# Altium PCB ESE516_shipwars_PCB.PcbDoc (part 2 of 2)
Units mil, origin at the board's own origin, x right, y up, seen from the top; angles counter-clockwise.
Board outline 2999 x 2670.2 mil, 4 copper layers (Top Layer, GroundPlane, PowerPlane, Bottom Layer), stack 58.4 mil thick; 119 components, 72 nets, 383 pads, 75 vias.
Unrouted connection lines stored in the file: 92.
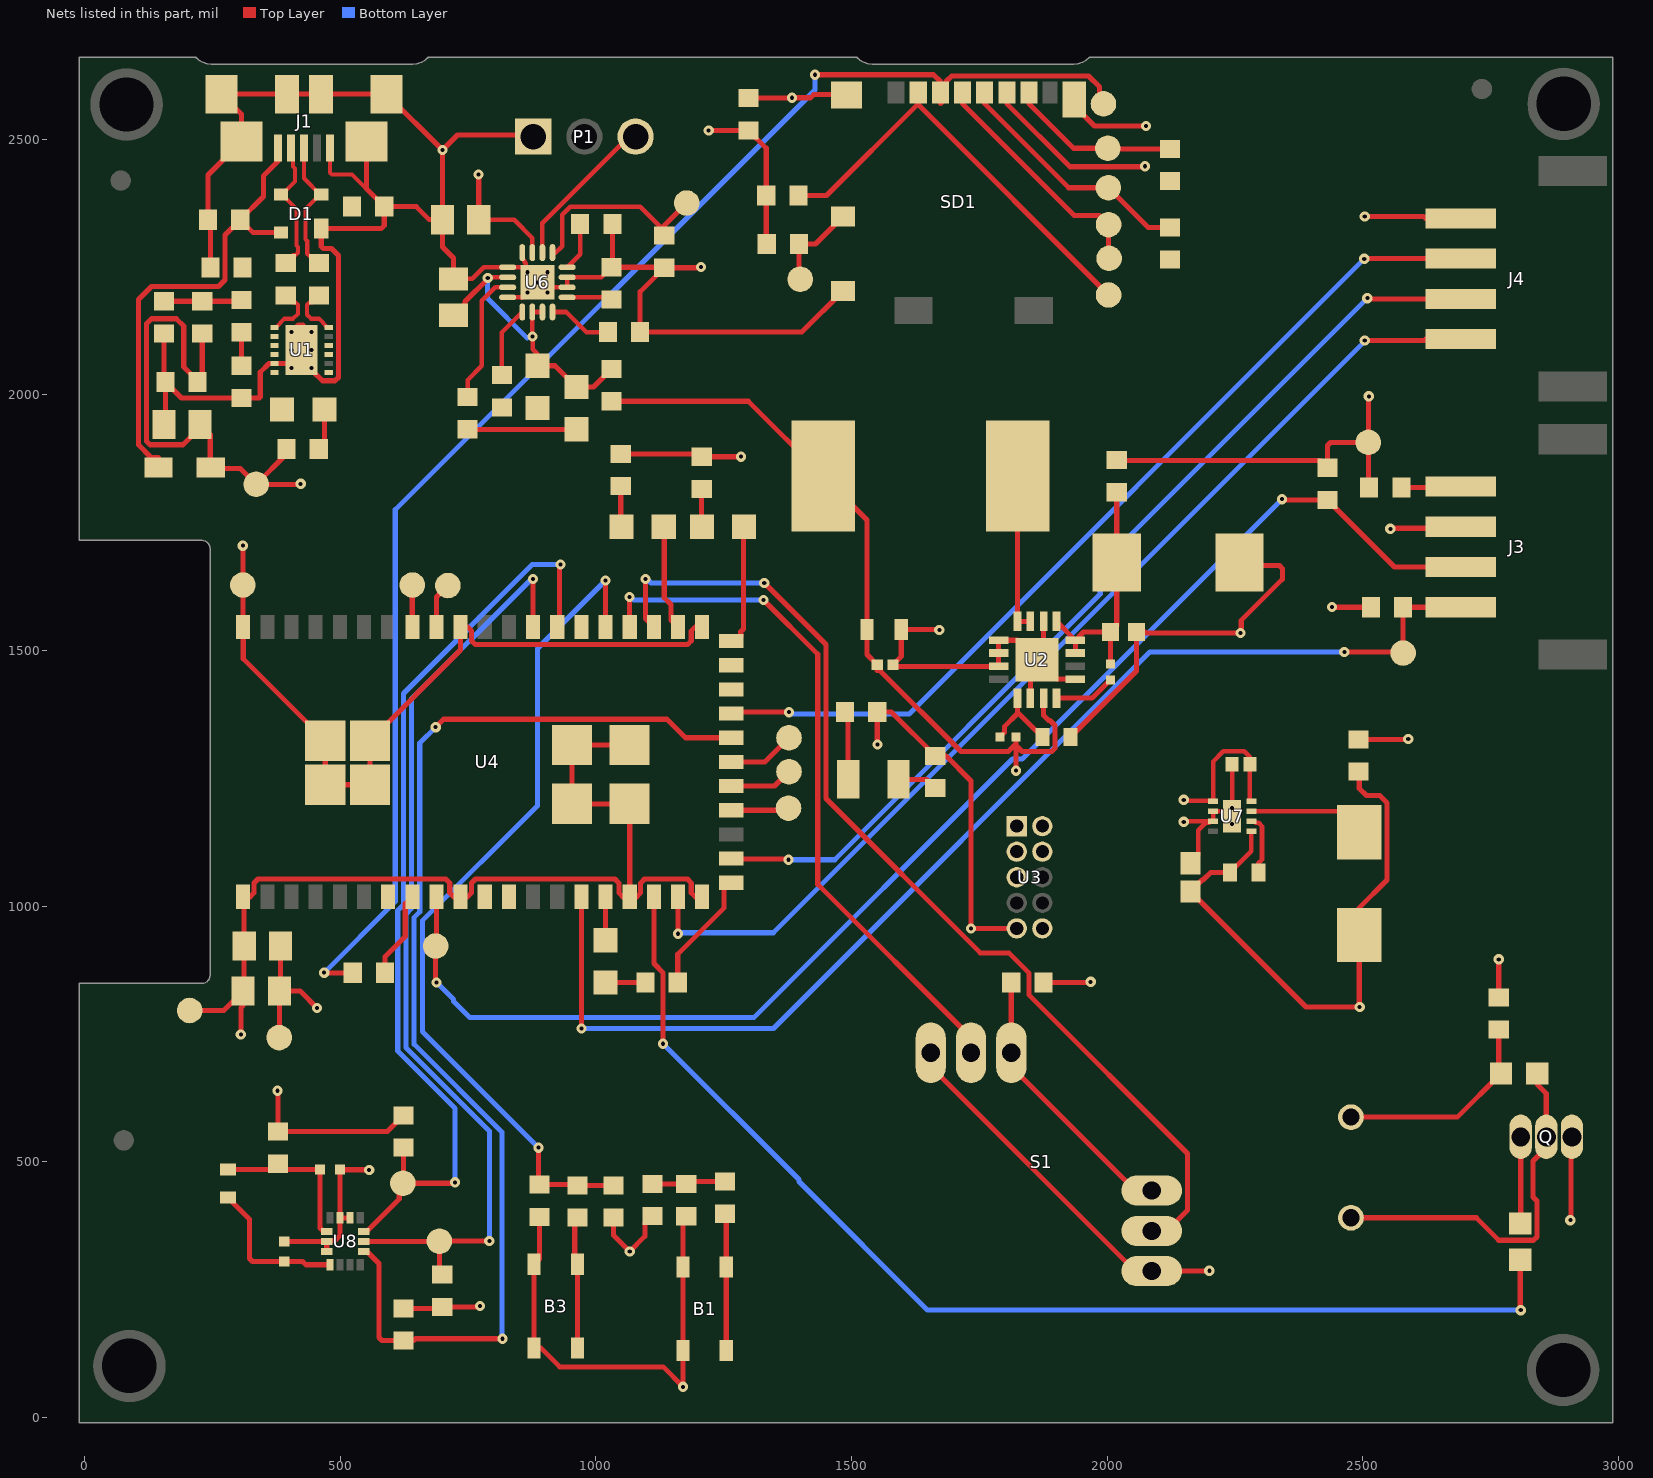
[diagram p2: the nets of this part, all layers, seen from the top]

## Part data (continued)
R1 R2 R8 R9 R10: library part CMP-1012-00331-1, "27R 0.1W 1% 0603 (1608 Metric)  SMD", Case-EIA=0603, Case-Metric=1608, Power="0.1 W", Tolerance="1 %", Technology=SMT
R1bck: library part CMP-1012-00762-2, "RC0603FR-07178KL", Manufacturer=Yageo, Part Number=RC0603FR-07178KL
R1bst: library part CMP-2002-00322-1, "1% 0402(1005)CRCW04022M15FKED", Manufacturer="Vishay Dale", Part Number=CRCW04022M15FKED
R2bst: library part CMP-1012-00802-1, "390K 0.1W 1% 0603 (1608 Metric)  SMD", Case-EIA=0603, Case-Metric=1608, Power="0.1 W", Tolerance="1 %", Technology=SMT
R3 R5 R6 R7 R15 R16 R18 R19 R24 R37: library part CMP-1012-00510-1, "1K 0.1W 1% 0603 (1608 Metric)  SMD", Case-EIA=0603, Case-Metric=1608, Power="0.1 W", Tolerance="1 %", Technology=SMT
R3bst: library part CMP-2002-00322-1, "1% 0402(1005) CRCW04022M15FKED", Manufacturer="Vishay Dale", Part Number=CRCW04022M15FKED
R4 R22 R23 R25 R27 R28 R31 R33: library part CMP-1012-00001-1, "Jumper 0603 (1608 Metric)", Case-EIA=0603, Case-Metric=1608, Power=None, Technology=SMT, Tolerance=None
R11 R13 R14 R17 R26 R29 R30 R32 R34: library part CMP-1012-00623-1, "10K 0.1W 1% 0603 (1608 Metric)  SMD", Case-EIA=0603, Case-Metric=1608, Power="0.1 W", Tolerance="1 %", Technology=SMT
R12 R35: library part CMP-1012-00397-1, "100R 0.1W 1% 0603 (1608 Metric)  SMD", Case-EIA=0603, Case-Metric=1608, Power="0.1 W", Tolerance="1 %", Technology=SMT
R20 R21: library part CMP-1012-00515-1, "1K13 0.1W 1% 0603 (1608 Metric)  SMD", Case-EIA=0603, Case-Metric=1608, Power="0.1 W", Tolerance="1 %", Technology=SMT
S1: "Mini 2-Axis Analog Thumbstick", Manufacturer="Adafruit Industries", Manufacturer Part Number=2765, Resistance=10kR, Supplier Part Number 1=1528-1730-ND, ComponentLink1Description=https://media.digikey.com/pdf/Data%20Sheets/Adafruit%20PDFs/2765_Web.pdf?src-supplier=Digi-Key, ComponentLink1URL=https://media.digikey.com/pdf/Data%20Sheets/Adafruit%20PDFs/2765_Web.pdf?src-supplier=Digi-Key, Height=0.472inch, Length=0.707inch, Mount="Through Hole", Packaging=Bulk, Pricing 1="1=2.50000 (USD)", RoHS=Yes, Stock 1=673, Supplier 1=Digi-Key, Width=0.697inch
SD1: library part CMP-2000-05825-1, "Micro SD Card, RA, -25 to 85 degC, 8-Pin SMD, RoHS, Tape and Reel", Current Rating=500mA, Manufacturer=Molex, Package Description="8-Pin Surface Mount Device, Body 11.95 x 11.4 mm, Pitch 1.1 mm", Voltage Rating=10VAC/DC, Brand=Molex, Card Type=microSD, Contact Material=PhosphorBronze, Contact Plating=Gold, Datasheet URL=http://www.molex.com/pdm_docs/sd/1040310811_sd.pdf, Datasheet Version="Rev. E, 04/2006", Height=1.42mm, Housing Material=LiquidCrystalPolymer(LCP), Insertion - Extraction Style=Push-Pull, Length=11.4mm, Manufacturer URL=http://www.molex.com/, Mating Cycles=10000, Mounting Technology=SurfaceMount, Mounting Type=Standard, Number of Contacts=8, Number of Rows=1Row, Orientation=RightAngle, Package Reference=104031-0811, Packaging=Reel, Pitch=1.1mm, Product=CardConnectors, Product Category=MemoryCardConnectors, RoHS=True, Series=104031, Termination Style=SMD
TP1 TP2 TP3 TP4 TP5 TP6 TP7 TP8 TP9 TP10 TP11 TP12 TP13 TP14 TP15 TP16 TP17 TP18 TP19 TP20 TP21 TP22: library part "0.1\" Pad-A.4"
U1: library part CMP-0248-00027-1, "FT234XD USB to BASIC UART IC, -40 to +85 degC, 12-Pin DFN, Pb-Free, Tape and Reel", Manufacturer=FTDI, ComponentLink1Description="Manufacturer URL", ComponentLink1URL=http://www.ftdichip.com/, ComponentLink2Description=Datasheet, ComponentLink2URL=http://www.ftdichip.com/Support/Documents/DataSheets/ICs/DS_FT234XD.pdf, DatasheetVersion="ver 1.1, Feb-2013", PackageDescription="12-Pin Dual Flat No-Lead, 3 x 3 mm Body, 0.45 mm Pitch, Exposed Pad", PackageReference=DFN-12, PackageVersion=Feb-13, PartNumber=FT234XD-R
U2: "5-V Output, 1-A, 96% Efficient Boost Converter w/20uA Iq in TSSOP-16 16-QFN -40 to 85", Case/Package=VQFN, Manufacturer="Texas Instruments", Max Input Voltage=5.5V, Max Operating Temperature=85°C, Max Output Current=1A, Min Input Voltage=1.8V, Min Operating Temperature=-40°C, Min Output Voltage=5V, Package Quantity=1, Quiescent Current=20uA, Switching Frequency=600kHz, Category="Voltage Regulators - Switching", ComponentLink1Description=https://datasheet.ciiva.com/15113/getdatasheetpartid-188315-15113727.pdf?src-supplier=Verical, ComponentLink1URL=https://datasheet.ciiva.com/15113/getdatasheetpartid-188315-15113727.pdf?src-supplier=Verical, ComponentLink2Description=https://datasheet.ciiva.com/26896/tps61032rsar-26896598.pdf?src-supplier=IIIC, ComponentLink2URL=https://datasheet.ciiva.com/26896/tps61032rsar-26896598.pdf?src-supplier=IIIC, ComponentLink3Description=https://datasheet.ciiva.com/2026/tps61030-2026189.pdf?src-supplier=Digi-Key, ComponentLink3URL=https://datasheet.ciiva.com/2026/tps61030-2026189.pdf?src-supplier=Digi-Key, ComponentLink4Description=https://datasheet.ciiva.com/2026/tps61030-2026190.pdf?src-supplier=Digi-Key, ComponentLink4URL=https://datasheet.ciiva.com/2026/tps61030-2026190.pdf?src-supplier=Digi-Key, ComponentLink5Description=https://datasheet.ciiva.com/2026/tps61030-2026191.pdf?src-supplier=Digi-Key, ComponentLink5URL=https://datasheet.ciiva.com/2026/tps61030-2026191.pdf?src-supplier=Digi-Key, ComponentLink6Description=https://datasheet.ciiva.com/22684/1902788-22684647.pdf?src-supplier=Element14, ComponentLink6URL=https://datasheet.ciiva.com/22684/1902788-22684647.pdf?src-supplier=Element14, Efficiency=96%, Lead Free="Lead Free", Manufacturer Part Number=TPS61032RSAR, Mount="Surface Mount", Nominal Output Voltage=5V, Number of Outputs=1, Number of Pins=16, Operating Supply Voltage=5.5V, Output Configuration=Positive, Output Current=1A, Output Type=Fixed, Output Voltage=5V, Packaging="Tape and Reel", Pricing 1="1=3.13000, 10=2.80800, 25=2.65440, 100=2.30060, 250=2.18260, 500=1.95844, 1000=1.94775 (USD)", Radiation Hardening=No, REACH SVHC="No SVHC", RoHS=Yes, RoHS Compliant=Yes, Series=-, Stock 1=952, Supplier 1=Digi-Key, Synchronous Rectifier=Yes, Topology=Boost, Weight=0.001464oz, Width=4mm
U3: "CONN HEADER 10POS UNSHD VERT T/H", Current Rating="10 A", Manufacturer="Amphenol / FCI", Supplier Part Number 1=609-3712-ND, Voltage Rating="125 V", Brand=FCI, ComponentLink1Description=https://datasheet.ciiva.com/1433/1079612-1433267.pdf, ComponentLink1URL=https://datasheet.ciiva.com/1433/1079612-1433267.pdf, ComponentLink2Description=https://datasheet.ciiva.com/409/20021111-409158.pdf, ComponentLink2URL=https://datasheet.ciiva.com/409/20021111-409158.pdf, ComponentLink3Description=https://datasheet.ciiva.com/5131/20021111-5131386.pdf, ComponentLink3URL=https://datasheet.ciiva.com/5131/20021111-5131386.pdf, ComponentLink4Description=https://datasheet.ciiva.com/9465/20021111-9465402.pdf, ComponentLink4URL=https://datasheet.ciiva.com/9465/20021111-9465402.pdf, Contact Material=Nickel, Contact Plating=Gold, Factory Pack Quantity=93, Housing Material=Plastic, Manufacturer Part Number=20021111-00010T4LF, Mating Post Length="3.05 mm", Mounting Angle=Vertical, Mounting Style="Through Hole", Number of Positions=10, Number of Positions / Contacts=10, Number of Rows=2, Packaging=Tube, Pitch="1.27 mm", Product Category="Headers & Wire Housings", Product Type=Headers, RoHS=Details, Series=Minitek, Stack Height="2.5 mm", Supplier 1=Digi-Key, Termination Post Length="2.3 mm", Termination Style="Through Hole", Type=Unshrouded
U4: "RF TXRX MODULE WIFI TRACE ANT", Current - Receiving=-, Frequency=2.4GHz, Manufacturer=Atmel, Manufacturer Part Number=ATSAMW25H18-MR510PB, Operating Temperature="-40°C ~ 85°C", Package / Case=Module, Power - Output=17dBm, Supplier Part Number 1=ATSAMW25H18-MR510PB-ND, Voltage - Supply="2.7 V ~ 4.2 V", Antenna Type="Integrated, Trace", Category="RF/IF and RFID", ComponentLink1Description=http://www.atmel.com/devices/ATSAMW25.aspx, ComponentLink1URL=http://www.atmel.com/devices/ATSAMW25.aspx, ComponentLink2Description=http://www.farnell.com/datasheets/1965115.pdf, ComponentLink2URL=http://www.farnell.com/datasheets/1965115.pdf, Current - Transmitting=-, Data Rate=65Mbps, Family="RF Transceiver Modules", Memory Size="256kB Flash, 32kB SRAM", Modulation=-, Mounting Type="Surface Mount", Packaging=Tray, Pricing 1="1=19.14 (USD)", Protocol=802.11b/g/n, RF Family/Standard=WiFi, Sensitivity=-95.5dBm, Serial Interfaces="SPI, UART", Series="Xplained Pro", Stock 1=120, Supplier 1=Digikey
U6: library part CMP-0321-00237-1, "USB-Friendly Li-Ion Battery Charger and Power-Path Management IC, Vout 5.5 V, 4.3 V, -40 to 85 degC, 16-pin QFN (RGT), Green (RoHS & no Sb/Br)", Manufacturer="Texas Instruments", Over Voltage Protection=N, Code_JEDEC=MO-220, ComponentLink1Description=Datasheet, ComponentLink1URL=http://www.ti.com/general/docs/lit/getliterature.tsp?genericPartNumber=BQ24075&fileType=pdf, DatasheetVersion=SLUS810G, Eco-Plan="Green (RoHS & no Sb/Br)", Lead Acid=N, Li-Ion=N, Li-Polymer=N, Mounting Technology="Surface Mount", NiCd=N, NiMH=N, PackageDescription="16-Pin Plastic Quad Flat No-Lead, 3 x 3 mm Body, 0.5 mm Pitch, 1.7 x 1.7 mm Exposed Pad", PackageReference=RGT16-1700X1700TP, PackageVersion="revH, Oct-2011", PartNumber=BQ24075RGTRG4, SubFamily="Battery Charge Management", Vin(Min)(V)=4.3
U7: library part CMP-0323-00344-1, "Buck Step Down Regulator with 2.3 to 6 V Input and 3.3 V Output, -40 to 85 degC, 8-Pin WSON (DSG), Green (RoHS & no Sb/Br)", Manufacturer="Texas Instruments", Rating=Catalog, Switch Current Limit(Typ)(A)=2.4, Code_JEDEC=MO-229, ComponentLink1Description=Datasheet, ComponentLink1URL=http://www.ti.com/general/docs/lit/getliterature.tsp?genericPartNumber=TPS62082&fileType=pdf, ComponentLink2Description="URL Link1", ComponentLink2URL="Samples URL:http://www.ti.com/product/tps62082#samples", DatasheetVersion=SLVSAE8B, Duty Cycle(Max)(%)=100, Eco-Plan="Green (RoHS & no Sb/Br)", Iout(Max)(A)=1.2, Iq(Typ)(mA)=0.006, Mounting Technology="Surface Mount", PackageDescription="8-Pin Plastic Small Outline No-Lead, 2 x 2 x 0.8 mm Body, 0.5 mm Pitch, Exposed Pad", PackageReference=DSG8-1600X900TP, PackageVersion="revB, Oct-2010", PartNumber=TPS62082DSGR, Regulated Outputs(#)=1, SubFamily="Step-Down Regulator", Topology=Buck, Vin(Max)(V)=6, Vin(Min)(V)=2.3, Vout(Max)(V)=3.3, Vout(Min)(V)=3.3
U8: library part CMP-12177-000012-1, "INEMO INERTIAL MODULE: 3D ACCELE", Manufacturer=STMicroelectronics, Max Supply Voltage=3.6V, Min Supply Voltage=1.62V, Operating Supply Current=0.55mA, Package=LGA-14L-DM00249496, Temperature="-40°C to +85°C", Temperature Range High=+85°C, Temperature Range Low=-40°C, Accel Range=2/4/8/16g, Automotive=No, Category=IC, ComponentLink2Description=Datasheet, ComponentLink2URL=https://www.st.com/resource/en/datasheet/lsm6dso.pdf, Device Class L1=Sensors, Device Class L2="Motion Sensors", Device Class L3="Inertial Measurement Units (IMUs)", Digikey Description="CONSUMER MEMS", Footprint Url=https://www.st.com/content/ccc/resource/technical/document/technical_note/73/17/9c/16/dd/96/4a/01/CD00134799.pdf/files/CD00134799.pdf/jcr:content/translations/en.CD00134799.pdf, Gyro Range=125/250/500/1000/2000°/s, Height=0.86mm, Lead Free=Yes, Manufacturer Part Number=LSM6DSOTR, Octopart=https://octopart.com/lsm6dsotr-stmicroelectronics-81706672, RoHS=TRUE, Sensor Output=I2C,SPI, Sensor Type=Temperature,Accelerometer,Gyroscope
X1: library part CMP-0447-00001-2, "Crystal, 32.768 kHz, 12.5 pF, -40 to 85 degC, SMD Low Profile 3.2 x 1.5 x 0.9 mm, Tape and Reel", Equivalent Series Resistance (R1)="70 Kohm", Frequency="32.768 kHz", Frequency Tolerance @+25degC="+/- 20 ppm", Insulation Resistance (Min)="500 Mohm", Load Capacitance (CL)="12.5 pF", Manufacturer=Abracon, Operating Temperature="-40 to 85 degC", Q Value (Type)=30000, Shunt Capacitance (C0)="0.9 to 1.2 pF", ComponentLink1Description="Manufacturer URL", ComponentLink1URL=http://www.abracon.com/, ComponentLink2Description=Datasheet, ComponentLink2URL=http://www.abracon.com/Resonators/ABS07.pdf, ComponentLink3Description="Package Specification", ComponentLink3URL=http://www.abracon.com/Resonators/ABS07.pdf, DatasheetVersion=04.03.13, Drive Level (Type)="0.1 uW", Mounting Technology="Surface Mount", Operation Mode="Flexural Mode (Tuning Fork)", PackageDescription="2-Pin Hand Drawn, Body 3.2x1.5mm, Pitch 2.5mm", PackageReference=ABS07-2, Packing="Tape and Reel", PartNumber=ABS07-32.768KHz-T

## Free pads (board coordinates)
  round 141.73 hole 106.3 paste-102.36: HH1(82.52,2567.69) HH2(2893,2569) HH3(88,101) HH4(2892,93)

## Via types
v1: diameter 20, hole 8, Top Layer to Bottom Layer, 62 vias
v2: diameter 19.68, hole 7.87, Top Layer to Bottom Layer, 8 vias
v3: diameter 19.68, hole 7.87, Top Layer to Bottom Layer, tented top, 5 vias

## Nets (pads, with @x,y where several pads share a name; then routed paths per layer and width w, separated by ;. In a path a pad name is that pad's centre, name@x,y a point inside that pad or via, vN(x,y) a via of type N, cw(c..) or ccw(c..) an arc to the next point about the centre after c; other vN are vias at no path point)
3V3: C10.2 C11.2 C15.2 R7.1 R11.2 R13.2 R14.2 R24.1 R25.2 R28.2 R29.2 R30.2 R31.2 R32.2 R33.2 R34.1 R37.1 SD1.4 TP6.1 TP12.1 TP22.1 U3.1 U4.7 U4.21 | length 2451.2
  Top Layer w10: v1(378,639) 379,638 R28.2@379,559.22 592.5,559.22 R30.2@624,590.72 ; TP12.1@381,743 381.43,743.43 C11.2@381.43,834 ; C10.2@383.43,922 383.43,836 C11.2@381.43,834 ; v1(455,801) 422,834 C11.2@381.43,834 ; R34.1@624,213.44 696.93,213.44 R29.2@700,216.5 772.5,216.5 v1(774,218) ; R32.2@1035,390.88 1035,356.41 v1(1066.56,324.85) 1096.11,354.41 1096.11,381.04 1108.83,393.76 R11.2@1110.8,393.76 ; R37.1@1049,1884.5 1201.79,1884.5 R24.1@1207.29,1879 v1(1284,1879) ; R7.1@1160.5,851 1160.5,906.02 1251.24,996.76 1251.24,1032.09 U4.21@1265.02,1045.87 ; v1(1221,2517) 1221.13,2517.13 C15.2@1298.5,2517.13 1333.5,2482.13 R13.2@1333.5,2390 1333.5,2296 R14.2@1334.5,2295 ; SD1.4@1717.38,2591.09 1717.38,2569.44 1935.93,2350.89 1984.98,2350.89 TP6.1@2003,2332.87 2003,2267.87 TP22.1@2004,2266.87 ; R33.2@1875.73,851 1967,851 v1(1968,852) ; R25.2@2492,1326 2588,1326 v1(2589,1327) ; R31.2@2766,821.5 v1(2766,896)
5V: C8.2 R17.2 R22.2 R26.2 R27.2 TP20.1 U7.1 U7.8 | length 1103.8
  Top Layer w9: v1(2150,1208) 2151.46,1206.54 2206.81,1206.54 2207.31,1206.03 2207.31,1282.93 2227.56,1303.17 2268.28,1303.17 2279.28,1292.17 C8.2@2279.28,1278 2279.28,1208.36 U7.8@2282.12,1205.53
  Top Layer w10: R22.2@2022,1871.5 2417,1871.5 R17.2@2431,1857.5 2431,1901.14 2436.86,1907 TP20.1@2511,1907 ; v1(2440,1585) 2440.48,1584.52 R26.2@2515.95,1584.52 ; v1(2512,1997) 2511,1996 TP20.1@2511,1907 ; R27.2@2512.5,1819 2511,1820.5 TP20.1@2511,1907
ACC_I2C_SCL: R29.1 TP19.1 U4.39 U8.13 | length 1872.9
  Top Layer w10: U8.13@546,344.54 694.34,344.54 TP19.1@694.34,344.88 791.88,344.88 v1(792,345) ; R29.1@694.34,276.43 TP19.1@694.34,341.54 ; U4.39@877.58,1546.03 v1(877.58,1640)
  Bottom Layer w10: v1(792,345) 792,560.33 629,723.33 629,984.75 640,995.75 640,1405.76 874.24,1640 v1(877.58,1640)
ACC_I2C_SDA: R30.1 TP21.1 U4.38 U8.14 | length 1845.5
  Top Layer w10: U8.14@546,364.22 552.89,364.22 615.92,427.25 615.92,434.14 623,441.22 TP21.1@623,458.22 ; R30.1@624,527.73 624,459.22 TP21.1@623,458.22 ; v1(725,460) 723.22,458.22 TP21.1@623,458.22 ; U4.38@924.82,1546.03 929.09,1550.3 929.09,1666.09 v1(931,1668)
  Bottom Layer w10: v1(725,460) 725,604.7 613,716.7 613,991.37 624,1002.37 624,1416.12 875.88,1668 v1(931,1668)
ACC_MODE_SEL: R34.2 U4.27 U8.12 | length 2315.5
  Top Layer w10: U8.12@546,324.85 552.89,324.85 576.32,301.42 576.32,156.3 582.18,150.44 643.68,150.44 647.24,154 v1(818,154) ; v1(687,1350) 687,1350.4 702.24,1365.64 1139.36,1365.64 1175.66,1329.34 U4.27@1265.02,1329.34
  Bottom Layer w10: v1(687,1350) 656,1319 656,989.12 645,978.12 645,729.96 817,557.96 817,155 v1(818,154)
ADC_1_THUMBSTICK: S1.X1 U4.35 | length 1376.9
  Top Layer w10: v1(1066,1604.6) 1066,1546.58 U4.35@1066.56,1546.03 ; v1(1328,1599) 1434.28,1492.72 1434.28,1042.7 1734.02,742.96 S1.X1@1734.02,713.43
  Bottom Layer w10: v1(1066,1604.6) 1068.71,1604.6 1074.31,1599 v1(1328,1599)
ADC_2_THUMBSTICK: S1.Y1 U4.34 | length 2025.3
  Top Layer w10: v1(1097.5,1640) 1097.5,1562.33 U4.34@1113.8,1546.03 ; v1(1329.63,1632) 1330,1632 1450.28,1511.72 1450.28,1210.58 1752.1,908.76 1807.94,908.76 1847.02,869.68 1847.02,826.76 2157.41,516.37 2157.41,405.53 2116.88,365 S1.Y1@2087.35,365
  Bottom Layer w10: v1(1097.5,1640) 1100.21,1640 1108.21,1632 v1(1329.63,1632)
BCK_SW: L1bck.1 U7.7 | length 228.2
  Top Layer w9: U7.7@2282.12,1185.84 L1bck.1@2451.69,1185.84
  Top Layer w10: L1bck.1@2451.69,1185.84 L1bck.1@2493.14,1144.39
BQ_BAT_TS: R6.1 TP5.1 U6.1 | length 392.6
  Top Layer w9: U6.1@915.53,2278.07 921.49,2278.07 934.36,2290.94 934.36,2351.82 950.55,2368 1086.99,2368 1134,2320.99 R6.1@1134,2311.5
  Top Layer w10: R6.1@1134,2320.99 1134,2331 TP5.1@1178,2375
BQ_ILIM: R20.2 U6.12 | length 125.2
  Top Layer w9: U6.12@915.53,2161.93 942.36,2161.93 982,2122.29 1023.15,2122.29 R20.2@1024,2123.14
BQ_ISET: R21.2 U6.16 | length 95
  Top Layer w9: U6.16@944.07,2249.53 969.5,2274.96 R21.2@969.5,2334
BST_SWTC_IN: L1bst.1 U2.3 U2.4 | length 309
  Top Layer w10: L1bst.1@1825,1841 U2.4@1825,1557 U2.3@1850,1557
CBUS0: D5.2 U1.6
FLASH_MEM_SPI_SS: R13.1 SD1.2 TP11.1 U4.37 | length 858.6
  Top Layer w10: R13.1@1396.5,2390 1451.33,2390 SD1.2@1630.77,2569.44 ; SD1.2@1630.77,2591.09 SD1.2@1630.77,2569.44 ; TP11.1@2003,2195.3 1630.77,2567.53 SD1.2@1630.77,2569.44
GND: B1.3 B1.4 B3.3 B3.4 C1.1 C1bst.1 C2.1 C2bst.1 C3.1 C3bst.1 C4.1 C4bst.2 C5.1 C6.1 C7.1 C8.1 C10.1 C11.1 C12.1 C13.1 C14.1 C15.1 C16.2 C17.2 C18.1 C24.1 C25.1 C26.2 Coutbck.1 D1.1 J1.5 J1.6 J1.7 J1.8 J1.9 J1.10 J1.11 J3.3 J4.4 P1.1 Q.1 R2bst.1 R6.2 R20.1 R21.1 S1.X3 S1.Y3 SD1.6 SD1.10 SD1.11 SD1.12 TP3.1 TP13.1 U1.5 U1.13 U2.2 U2.5 U2.6 U2.7 U2.10 U2.13 U2.17 U3.3 U3.5 U3.9 U4.0 U4.1 U4.10 U4.17 U4.20 U4.32 U4.42 U4.51 U6.4 U6.5 U6.8 U6.14 U6.15 U6.17 U7.2 U7.3 U7.9 U8.2 U8.3 U8.6 U8.7 | length 13283.5
  Top Layer w8: J1.5@480.76,2482.69 480.76,2434.24 484,2431 523.5,2431 551.63,2402.87
  Top Layer w9: C25.1@722,2226.43 722.74,2227.18 758.77,2227.18 780.73,2249.14 827.38,2249.14 U6.5@827.93,2248.59 ; U6.8@827.93,2190.47 U6.17@856.47,2190.47 ; U6.5@827.93,2249.53 856.47,2249.53 859.66,2246.34 U6.17@859.66,2249.53 ; U6.4@856.47,2278.07 856.47,2266.3 860.15,2262.63 860.15,2261.75 860.15,2260.22 863.38,2256.98 863.38,2242.62 v3(886,2220) ; U6.17@914.46,2210.16 U6.14@944.07,2210.16 U6.15@944.07,2229.84 1011.32,2229.84 C24.1@1031,2249.53 ; v1(2150,1165) 2151.16,1166.16 U7.3@2207.31,1166.16 ; Coutbck.1@2163.34,1083.72 2178.15,1098.52 2178.15,1148.21 2192.92,1162.98 2199.81,1162.98 2202.47,1165.65 2206.8,1165.65 U7.3@2207.31,1166.16 ; C8.1@2244.72,1278 v2(2244.72,1191.75) 2238.81,1185.84 U7.2@2207.31,1185.84 U7.3@2207.31,1166.16
  Top Layer w10: C4.1@155.57,1942 158.5,1944.94 C3.1@158.5,2025.28 ; C7.1@155.57,2120.11 155.57,2028.21 C3.1@158.5,2025.28 ; TP13.1@206,796 272.57,796 C11.1@310.57,834 ; C5.1@246.5,2249 246.5,2338 C2.1@242.01,2342.5 242.01,2429.95 J1.11@307.54,2495.48 307.54,2548.63 J1.10@268.17,2588 J1.9@396.12,2588 J1.8@463.05,2588 J1.7@591,2588 v1(700.41,2478.59) ; v1(306,749) 306,800.89 310.57,805.46 C11.1@310.57,834 ; v1(310,1705) TP3.1@310,1628 310,1546.68 U4.51@310.65,1546.03 310.65,1483.81 U4.0@471.08,1323.38 U4.0@471.08,1237.47 U4.0@558.41,1237.47 U4.0@558.41,1323.38 735.85,1500.82 U4.42@735.85,1546.03 749.63,1546.03 757.19,1538.47 757.19,1518.97 764.75,1511.41 1179.38,1511.41 1186.94,1518.97 1186.94,1538.47 1194.51,1546.03 U4.32@1208.29,1546.03 ; C16.2@391,344.54 U8.6@474.15,344.54 ; v2(405.17,2052.28) 396.31,2061.13 U1.5@371.7,2061.13 361.07,2061.13 344,2044.07 344,1995.56 342.22,1993.78 C1.1@307.54,1993.78 190,1993.78 C3.1@158.5,2025.28 ; v2(405.17,2123.14) 418.94,2136.92 427.23,2136.92 446.4,2117.75 446.4,2046.67 465.57,2027.5 490.43,2027.5 496.87,2033.94 496.87,2272.58 483.24,2286.21 467.35,2286.21 463.25,2290.31 D1.1@463.25,2325 580.5,2325 586.5,2331 C6.1@586.5,2368 ; U8.7@474.15,324.85 U8.6@474.15,344.54 ; U8.2@519.92,390.31 U8.3@500.23,390.31 ; J1.6@551.63,2495.48 551.63,2402.87 C6.1@586.5,2368 ; v1(557,484) 556.5,484.5 500.73,484.5 C17.2@500.23,485 U8.3@500.23,390.31 ; C25.1@722,2226.43 722,2267.63 700.41,2289.21 C26.2@700.41,2342.5 ; U6.17@856.47,2190.47 v3(866.32,2200.31) ; U6.17@859.66,2246.34 v3(866.31,2239.68) ; P1.1@870,2508 729.83,2508 v1(700.41,2478.59) ; C18.1@890,392.5 890,310.02 B3.3@879.68,299.69 B3.4@879.68,136.31 892.47,136.31 929.67,99.11 1131.89,99.11 v1@1170.68,60.32 ; v3(905.69,2200.31) 905.69,2201.38 U6.17@914.46,2210.16 ; R21.1@1032.5,2334 1032.5,2251.02 C24.1@1031,2249.53 1132.98,2249.53 R6.2@1134,2248.5 ; U4.0@1066,1315.27 U4.0@953.6,1315.27 U4.0@953.6,1200.15 U4.0@1066,1200.15 1066.56,1199.6 U4.17@1066.56,1018.47 ; v1(1171,60) v1@1170.68,60.32 ; C12.1@1177,393.5 1170.68,387.18 B1.3@1170.68,294.69 B1.4@1170.68,131.31 v1@1170.68,60.32 ; v1(1206,2250) 1204.5,2248.5 R6.2@1134,2248.5 ; U4.20@1208.29,1018.47 1194.51,1018.47 1186.94,1026.04 1186.94,1045.53 1179.38,1053.09 1095.46,1053.09 1087.9,1045.53 1087.9,1026.04 1080.33,1018.47 U4.17@1066.56,1018.47 ; C15.1@1298.5,2580.13 1383.13,2580.13 v1(1384,2581) 1420.4,2581 1426.4,2587 1491,2587 1490.17,2586.17 SD1.11@1490.61,2586.17 ; SD1.10@1483.72,2203.3 1403.57,2123.14 R20.1@1086.99,2123.14 1086.99,2201.5 R6.2@1134,2248.5 ; v1(1551,1316) 1550.65,1316.35 C13.1@1550.65,1379.44 1578.55,1379.44 C14.1@1664,1293.99 1684.96,1293.99 1734.02,1244.94 v1(1734.02,956.54) U3.9@1823.44,956.54 ; S1.X3@1655.26,713.43 1655.26,686.36 2055.36,286.26 S1.Y3@2087.35,286.26 2087.72,286.63 2199.63,286.63 v1(2200,287) ; v1(1672,1540) 1671,1541 C1bst.1@1597.46,1541 1597.46,1488.11 C2bst.1@1581.35,1472 1584.35,1469 U2.7@1788,1469 U2.6@1788,1495 U2.5@1788,1520 1825,1520 U2.17@1863,1482 ; SD1.6@1804,2591.09 1804,2569.44 1927.31,2446.13 2073.13,2446.13 v1(2074,2447) ; U2.10@1850,1407 1850,1469 U2.17@1863,1482 ; U2.2@1876,1557 1876,1495 U2.17@1863,1482 ; R2bst.1@1928.56,1331 2057.59,1460.03 C3bst.1@2057.59,1536 2074.32,1536 2076.32,1534 v1(2261,1534) 2262.5,1535.5 2262.5,1559 2342.86,1639.35 2342.86,1660.14 2337,1666 2265.08,1666 C4bst.2@2259.08,1672 ; SD1.12@1936.28,2577.31 1936.28,2564.91 1975.69,2525.5 v1(2076.32,2525.5) ; U2.13@1938,1444 1901,1444 U2.17@1863,1482 ; v1(2504,2349) 2619.15,2349 2623.1,2345.05 J4.4@2692,2345.05 ; v1(2554,1738) 2555,1739 2688,1739 2691,1742 J3.3@2692,1742 ; v1(2906,386) 2907.5,387.5 2907.5,547.5 Q.1@2909,549 ; C11.1@310.57,834 312.57,836 C10.1@312.57,922 312.57,1016.56 U4.1@310.65,1018.47 324.43,1018.47 331.99,1026.04 331.99,1045.53 339.56,1053.09 706.94,1053.09 714.5,1045.53 714.5,1026.04 722.07,1018.47 U4.10@735.85,1018.47 749.63,1018.47 757.19,1026.04 757.19,1045.53 764.75,1053.09 1037.65,1053.09 1045.21,1045.53 1045.21,1026.04 1052.78,1018.47 U4.17@1066.56,1018.47 ; U8.6@474.15,344.54 481.04,344.54 482.83,346.33 490.02,346.33 500.23,356.54 U8.3@500.23,390.31 ; C6.1@586.5,2368 649,2368 674.5,2342.5 C26.2@700.41,2342.5 ; C26.2@700.41,2342.5 v1(700.41,2478.59)
  other v2: 2244.72,1160.25 444.54,2052.28 405.17,2087.71 444.54,2087.71 444.54,2123.14
  other v3: 905.68,2239.69
KEYPAD_I2C_SCL: J3.2 R17.1 TP17.1 U4.9 | length 2678.9
  Top Layer w10: TP17.1@684.5,922 688.6,926.11 U4.9@688.6,1018.47 ; TP17.1@687,922 687,852.6 v1(688.6,851) ; v1(2342,1796) 2343.5,1794.5 R17.1@2431,1794.5 2562.24,1663.26 J3.2@2692,1663.26
  Bottom Layer w10: v1(688.6,851) 722.26,817.34 722.26,813.74 754,782 1309.3,782 1815.34,1288.04 1834.04,1288.04 v1(2342,1796)
KEYPAD_I2C_SDA: J3.1 R26.1 TP18.1 U4.15 | length 2372.6
  Top Layer w10: v1(972.07,761) U4.15@972.07,1018.47 ; v1(2464,1497) 2576.94,1497 TP18.1@2578.94,1495 R26.1@2578.94,1584.52 J3.1@2692,1584.52
  Bottom Layer w10: v1(972.07,761) 1347.7,761 2083.7,1497 v1(2464,1497)
MCU_LED: DS1.2 U4.16 | length 85
  Top Layer w10: DS1.2@1019.31,933.5 U4.16@1019.31,1018.47
MCU_RESET: C12.2 R11.1 R12.2 TP16.1 U3.10 U4.24 | length 262.3
  Top Layer w10: R11.1@1107.8,459.75 R11.1@1110.8,456.75 1111.05,456.5 C12.2@1177,456.5 1182,461.5 R12.2@1253,461.5 ; U4.24@1265.02,1187.61 1372.86,1187.61 TP16.1@1377,1191.75
MCU_RX_UART_CLI: TP4.1 U1.10 U4.44 | length 82
  Top Layer w10: U4.44@641.36,1546.03 TP4.1@641.36,1628
MCU_TX_UART_CLI: TP2.1 U1.7 U4.43 | length 90.2
  Top Layer w10: U4.43@688.6,1546.03 688.6,1604.6 TP2.1@711,1627
MEM_SPI_CLK: R10.2 SD1.5 TP10.1 | length 484.2
  Top Layer w10: SD1.5@1760.69,2591.09 1760.69,2569.44 1925.13,2405 TP10.1@2002.59,2405 2080.09,2327.5 R10.2@2123,2327.5
MEM_SPI_MISO: R8.2 SD1.7 TP9.1 | length 334
  Top Layer w10: SD1.7@1847.3,2591.09 1847.3,2569.44 1934.61,2482.13 TP9.1@2001.59,2482.13 2002.72,2480.99 R8.2@2123,2480.99
MEM_SPI_MOSI: R9.2 SD1.3 TP8.1 | length 2901.7
  Top Layer w10: v1(469,870) 469.32,869.68 R9.2@525,869.68 ; v1(1429,2626) 1660.82,2626 1674.07,2612.74 SD1.3@1674.07,2591.09 1674.07,2569.44 1685.08,2580.45 1685.08,2612.73 1696.09,2623.74 1963.87,2623.74 1985.35,2602.27 1985.35,2576.65 TP8.1@1993,2569
  Bottom Layer w10: v1(469,870) 608,1009 608,1775.3 1429,2596.3 v1(1429,2626)
NetB1_1: B1.1 B1.2 R12.1 | length 268.2
  Top Layer w10: R12.1@1253,398.5 1255.32,396.18 B1.1@1255.32,294.69 B1.2@1255.32,131.31
NetB3_1: B3.1 B3.2 R35.1 | length 260.4
  Top Layer w10: R35.1@959,394.5 959,305.02 B3.1@964.32,299.69 B3.2@964.32,136.31
NetC16_1: C16.1 FB2.1 U8.8 | length 309.8
  Top Layer w10: FB2.1@291.89,429.88 FB2.1@281,429.88 323,387.88 323,311.03 328.86,305.17 C16.1@391,305.17 426.74,305.17 433.14,298.77 U8.8@480.55,298.77
NetD3_2: D3.2 R18.2 | length 13
  Top Layer w10: D3.2@876.84,1964.94 D3.2@886,1974.09
NetD4_2: D4.2 R19.2 | length 212.5
  Top Layer w10: R19.2@749.63,1932.57 D4.2@962.13,1932.57
NetD5_1: D5.1 R3.1 | length 81.5
  Top Layer w10: R3.1@458.5,1894 469.34,1904.84 D5.1@469.34,1971
NetDS1_1: DS1.1 R7.2 | length 78.3
  Top Layer w10: DS1.1@1019.31,850.82 1097.32,850.82 R7.2@1097.5,851
NetDS2_1: DS2.1 R24.2 | length 74.2
  Top Layer w10: R24.2@1207.29,1816.01 1207.29,1742.37 DS2.1@1207.66,1742
NetDS3_1: DS3.1 R37.2 | length 80.1
  Top Layer w10: R37.2@1049,1821.5 1049,1743.32 DS3.1@1050.32,1742
NetJ3_4: J3.4 R27.1 | length 117.2
  Top Layer w10: R27.1@2575.5,1819 2690.26,1819 J3.4@2692,1820.74
NetLS_1: LS.1 Q.2 R15.1 | length 725.4
  Top Layer w10: LS.1@2477,390.57 2722.23,390.57 2766.02,346.78 2834.21,346.78 2840.65,353.22 2840.65,423.54 2833.08,431.11 2833.08,501.43 2859,527.35 2859,633.78 2841.43,651.35 R15.1@2841.43,673
NetQ_3: Q.3 R16.2 | length 170
  Top Layer w10: R16.2@2808,379.43 2809,380.43 Q.3@2809,549
NetR1bck_2: R1bck.2 U7.6 | length 118.3
  Top Layer w9: U7.6@2282.12,1166.16 2287.63,1166.16 2290.8,1162.98 2296.52,1162.98 2302.96,1156.54 2302.96,1090.83 2295.84,1083.72 R1bck.2@2295.84,1066
NetR1bst_1: R1bst.1 R2bst.2 U2.9 | length 158.9
  Top Layer w10: R1bst.1@1790.25,1331 1799.11,1339.86 1799.11,1350.98 1825,1376.87 1825,1379.44 ; U2.9@1825,1407 1825,1379.44 ; R2bst.2@1873.44,1331 1825,1379.44
NetR3bst_1: R3bst.1 U2.12 | length 120.1
  Top Layer w10: U2.12@1901,1407 1970.91,1407 R3bst.1@2006.41,1442.5
NetR18_1: R18.1 U6.9 | length 140
  Top Layer w9: R18.1@816.43,2038.5 816.43,2121.89 U6.9@856.47,2161.93
NetR19_1: R19.1 U6.7 | length 261.5
  Top Layer w9: R19.1@749.63,1995.56 749.63,2028.94 777.37,2056.68 777.37,2184.29 803.23,2210.16 U6.7@816.43,2210.16
  Top Layer w10: U6.7@816.43,2210.16 U6.7@827.93,2210.16
ON/OFF_BUTTON: C18.2 R32.1 R35.2 U4.36 | length 1665.4
  Top Layer w10: v1(888,527.73) 888,453.5 C18.2@890,455.5 962.7,455.5 R35.2@964.32,453.87 R32.1@1035,453.87 ; v1(1019,1637) 1019.31,1636.69 U4.36@1019.31,1546.03
  Bottom Layer w10: v1(888,527.73) 661,754.73 661,971.49 886,1196.49 886,1504 v1(1019,1637)
PWM: R16.1 U4.18 | length 2289.1
  Top Layer w10: U4.18@1113.8,1018.47 1113.8,887.66 1131.78,869.68 v1(1131.78,731) ; R16.1@2808,308.57 2808,211 v1(2809,210)
  Bottom Layer w10: v1(1131.78,731) 1397.46,465.32 1397.46,461.54 1649,210 v1(2809,210)
RS: C7.2 R4.2 R5.2 U1.2 | length 152.9
  Top Layer w10: C7.2@155.57,2183.1 R5.2@230.5,2183.1 305.36,2183.1 R4.2@307.54,2185.28
SD_CARD_DETECT: R14.1 SD1.9 TP7.1 | length 178.6
  Top Layer w10: TP7.1@1400,2226 1397.5,2228.5 R14.1@1397.5,2295 1429.76,2295 SD1.9@1483.72,2348.96
SERCOM1_PAD2_SPI_MISO: R9.1 U4.8 | length 170.9
  Top Layer w10: R9.1@588,869.68 588,901.08 627.58,940.67 627.58,1004.69 U4.8@641.36,1018.47
SERCOM1_PAD2_SPI_MOSI: R8.1 U4.11
SERCOM1_PAD3_SPI_SCK: R10.1 U4.12
SPARE_1: J4.1 U4.19 | length 2085.8
  Top Layer w10: v1(1161.04,946) U4.19@1161.04,1018.47 ; v1(2504,2106) 2620.27,2106 2623.1,2108.83 J4.1@2692,2108.83
  Bottom Layer w10: v1(1161.04,946) 1163.04,948 1347.19,948 2504,2104.81 v1(2504,2106)
SPARE_2: J4.2 U4.22 | length 1916.5
  Top Layer w10: U4.22@1265.02,1093.12 1266.16,1091.98 1375.86,1091.98 v1(1377,1090.83) ; v1(2509,2189) 2510.43,2187.57 J4.2@2692,2187.57
  Bottom Layer w10: v1(1377,1090.83) 1467.39,1090.83 1986.82,1610.26 1986.82,1666.82 v1(2509,2189)
SPARE_3: J4.3 U4.28 | length 1798.4
  Top Layer w10: U4.28@1265.02,1376.58 1267.88,1379.44 v1(1378,1379.44) ; v1(2503,2266) 2503.31,2266.31 J4.3@2692,2266.31
  Bottom Layer w10: v1(1378,1379.44) 1381.44,1376 1613,1376 v1(2503,2266)
STATUS_LED: DS3.2 U4.33 | length 205.2
  Top Layer w10: DS3.2@1134,1740 1134,1603.23 1147.26,1589.96 1147.26,1559.81 U4.33@1161.04,1546.03
SWCLK: TP15.1 U3.4 U4.25 | length 124.6
  Top Layer w10: U4.25@1265.02,1234.85 1349.84,1234.85 TP15.1@1378,1263.01
SWDIO: TP14.1 U3.2 U4.26 | length 132.5
  Top Layer w10: U4.26@1265.02,1282.09 1330.76,1282.09 TP14.1@1378,1329.34
USB_DATA_N: C5.2 D1.3 J1.2 R1.1 | length 265
  Top Layer w8: D1.3@384.51,2391.93 D1.3@386.48,2391.93 ; R1.1@394,2259.5 407.72,2273.21 413.23,2273.21 417.91,2277.9 417.91,2289.21 414.88,2292.25 414.88,2363.53 D1.3@386.48,2391.93 ; J1.2@403.99,2482.69 407.87,2478.81 407.87,2446.84 411.71,2443 411.71,2417.16 D1.3@386.48,2391.93
USB_DATA_P: C6.2 D1.2 J1.3 R2.1 | length 258.2
  Top Layer w8: J1.3@432.88,2474 429.71,2470.83 429.71,2423.5 D1.2@461.28,2391.93 ; R2.1@459,2257.5 445.28,2271.21 440.6,2271.21 435.91,2275.9 435.91,2301.13 432.88,2304.17 432.88,2363.53 D1.2@461.28,2391.93 ; D1.2@463.25,2391.93 D1.2@461.28,2391.93
USB_FTDI_DATA_N: R1.2 U1.1 | length 105.9
  Top Layer w8: U1.1@371.7,2132 374.65,2132 383.35,2140.7 383.35,2141.06 391.13,2148.84 408.08,2148.84 417.5,2158.26 417.5,2176.1 412.81,2180.79 407.72,2180.79 R1.2@394,2194.5
USB_FTDI_DATA_P: R2.2 U1.12 | length 103.5
  Top Layer w8: R2.2@459,2194.5 445.28,2180.79 440.19,2180.79 435.5,2176.1 435.5,2156.61 443.27,2148.84 458.57,2148.84 466.35,2141.06 466.35,2140.7 475.05,2132 U1.12@478,2132
VBAT: C26.1 P1.3 U6.2 U6.3 | length 540.3
  Top Layer w9: C26.1@771.28,2342.5 840.44,2342.5 876.16,2306.78 U6.3@876.16,2278.07 ; U6.2@895.84,2278.07 895.84,2335.92 1067.92,2508 P1.3@1070,2508
  Top Layer w10: v1(771,2431) 771.28,2430.72 C26.1@771.28,2342.5
VBUS: C2.2 D1.4 FB1.1 J1.1 | length 928.9
  Top Layer w10: FB1.1@145,1858 145,1877.69 130.52,1877.69 105.93,1902.27 105.93,2186.42 131.33,2211.82 262.28,2211.82 275.22,2224.76 275.22,2312.72 C2.2@305,2342.5 ; J1.1@378.4,2482.69 378.4,2456.11 350.56,2428.27 350.56,2388.06 C2.2@305,2342.5 ; D1.4@384.51,2317.13 330.37,2317.13 C2.2@305,2342.5
VCC: LS.2 R15.2 R31.1 | length 416.4
  Top Layer w10: LS.2@2477,587.43 2684.99,587.43 R15.2@2770.57,673 2766,677.57 R31.1@2766,758.5
VCCIO: C1.2 R4.1 U1.3 U1.9 | length 65.5
  Top Layer w10: C1.2@307.54,2056.77 R4.1@307.54,2122.29
Vin: R33.1 S1.X2 S1.Y2 | length 539.7
  Top Layer w10: R33.1@1812.74,851 S1.X2@1812.74,713.43 1812.74,686.36 2055.36,443.74 S1.Y2@2087.35,443.74
Vin_acc: C17.1 FB2.2 R28.1 U8.5 | length 311.8
  Top Layer w10: FB2.2@281,485 376.99,485 379,487.01 381.01,485 C17.1@460.86,485 460.86,370.62 467.26,364.22 U8.5@474.15,364.22
VOUT: C1bst.2 C2bst.2 L1bst.2 R1bst.2 R23.2 U2.11 | length 1500.5
  Top Layer w10: R23.2@1031,1987.5 1298.5,1987.5 L1bst.2@1445,1841 1530.54,1755.46 C1bst.2@1530.54,1541 1530.54,1492.11 C2bst.2@1550.65,1472 1550.65,1460.98 1555.56,1460.98 1714.25,1302.28 1806.88,1302.28 1821.75,1317.15 ; R1bst.2@1821.75,1331 1821.75,1317.15 ; v1(1822,1265) 1821.75,1265.25 1821.75,1314.12 ; U2.11@1876,1407 1876,1373 1885.86,1363.14 1888.36,1363.14 1898.22,1353.27 1898.22,1308.73 1891.78,1302.28 1833.58,1302.28 1821.75,1314.12 ; 1821.75,1314.12 1821.75,1317.15
VOUT_5V: C3bst.2 C4bst.1 R3bst.2 R22.1 U2.1 U2.15 U2.16 | length 493
  Top Layer w10: U2.1@1901,1557 U2.16@1938,1520 ; U2.15@1938,1495 U2.16@1938,1520 ; R3bst.2@2006.41,1474 C3bst.2@2006.41,1536 ; R22.1@2018.92,1809.5 C4bst.1@2018.92,1672 2018.92,1548.51 C3bst.2@2006.41,1536 ; U2.16@1938,1520 1954,1536 C3bst.2@2006.41,1536
Vout_BQ: C25.2 D3.1 D4.1 R23.1 U6.6 U6.10 U6.11 | length 608.3
  Top Layer w9: v1(788.83,2228.25) 790.43,2229.84 U6.6@827.93,2229.84 ; v1(876.16,2114.28) U6.10@876.16,2161.93 U6.11@895.84,2161.93 ; v1@877.11,2113.33 877.11,2089.28 886,2080.39 D3.1@886,2056.77
  Top Layer w10: C25.2@722,2155.57 744.64,2178.2 744.64,2182.33 788.79,2226.49 v1(788.83,2228.25) v1@790.43,2229.84 ; v1(876.16,2114.28) v1@877.11,2113.33 ; D3.1@886,2056.77 920.6,2056.77 D4.1@962.13,2015.24 995.75,2015.24 R23.1@1031,2050.5
  Bottom Layer w10: v1(788.83,2228.25) v1(788.83,2228.25) 788.79,2188.21 865.29,2111.71 865.96,2112.37 874.24,2112.37 v1(876.16,2114.28)
VOUT_BUCK: Coutbck.2 L1bck.2 R1bck.1 R25.1 U7.5 | length 1135.7
  Top Layer w9: R1bck.1@2240.72,1066 2282.12,1107.39 U7.5@2282.12,1146.47
  Top Layer w10: R1bck.1@2240.72,1066 2202.74,1066 2187.7,1050.96 2185.75,1050.96 Coutbck.2@2163.34,1028.55 2388.89,803 v1(2494,803) 2493.14,803.86 L1bck.2@2493.14,943.61 2493.14,996.76 2547.45,1051.06 2547.45,1202.1 2533.35,1216.2 2507.24,1216.2 2493.14,1230.29 2493.14,1261.87 R25.1@2492,1263.01
VUSB: C3.2 C4.2 C24.2 FB1.2 R3.2 R5.1 TP1.1 U1.4 U6.13 | length 1125.2
  Top Layer w9: U6.13@944.07,2190.47 C24.2@1027.06,2190.47
  Top Layer w10: R5.1@230.5,2120.11 230.5,2034.28 C3.2@221.5,2025.28 221.5,2027.24 194.29,2054.45 194.29,2134.34 179.81,2148.83 131.33,2148.83 121.93,2139.43 121.93,1908.9 128.37,1902.46 192.8,1902.46 226.43,1936.09 C4.2@226.43,1942 246.18,1922.25 246.18,1856 305,1856 TP1.1@336,1825 ; R3.2@395.5,1894 395.5,1884.5 TP1.1@336,1825 ; v1(423,1826) 422,1825 TP1.1@336,1825 ; C24.2@1027.06,2190.47 C24.2@1031,2186.54
WIFI_STATUS_LED: DS2.2 U4.31 | length 239.4
  Top Layer w10: U4.31@1265.02,1518.31 1274.86,1518.31 1283.64,1527.09 1283.64,1536.94 1289,1542.3 DS2.2@1289,1742
XIN_32: C13.2 U4.29 X1.1 | length 134
  Top Layer w10: C13.2@1487.65,1379.44 1493.79,1373.31 X1.1@1493.79,1248
XOUT_32: C14.2 U4.30 X1.2 | length 78.8
  Top Layer w10: X1.2@1592.21,1248 1647,1248 C14.2@1664,1231
pads on no net: FD1. FD2. FD3. J1.4 J3.5 J4.5 P1.2 SD1.1 SD1.8 SD1.13 SD1.14 U1.8 U1.11 U2.8 U2.14 U3.6 U3.7 U3.8 U4.2 U4.3 U4.4 U4.5 U4.6 U4.13 U4.14 U4.23 U4.40 U4.41 U4.45 U4.46 U4.47 U4.48 U4.49 U4.50 U7.4 U8.1 U8.4 U8.9 U8.10 U8.11

## Silkscreen, mask and mechanical layers (free items; w line width, h text height)
Mechanical 4:
  the board outline again, w20

## Text inside footprints (layer, text, board x,y; h text height)
J1: Mechanical 1 "Board edge" at 209.58,2640.34 h7.87 r180